# Altium PCB IP3255_1.PcbDoc
Units mil, origin at the board's own origin, x right, y up, seen from the top; angles counter-clockwise.
Board outline 2952.76 x 2086.61 mil, 2 copper layers (Top, Bottom), stack 12.7 mil thick; 71 components, 40 nets, 185 pads, 414 vias.
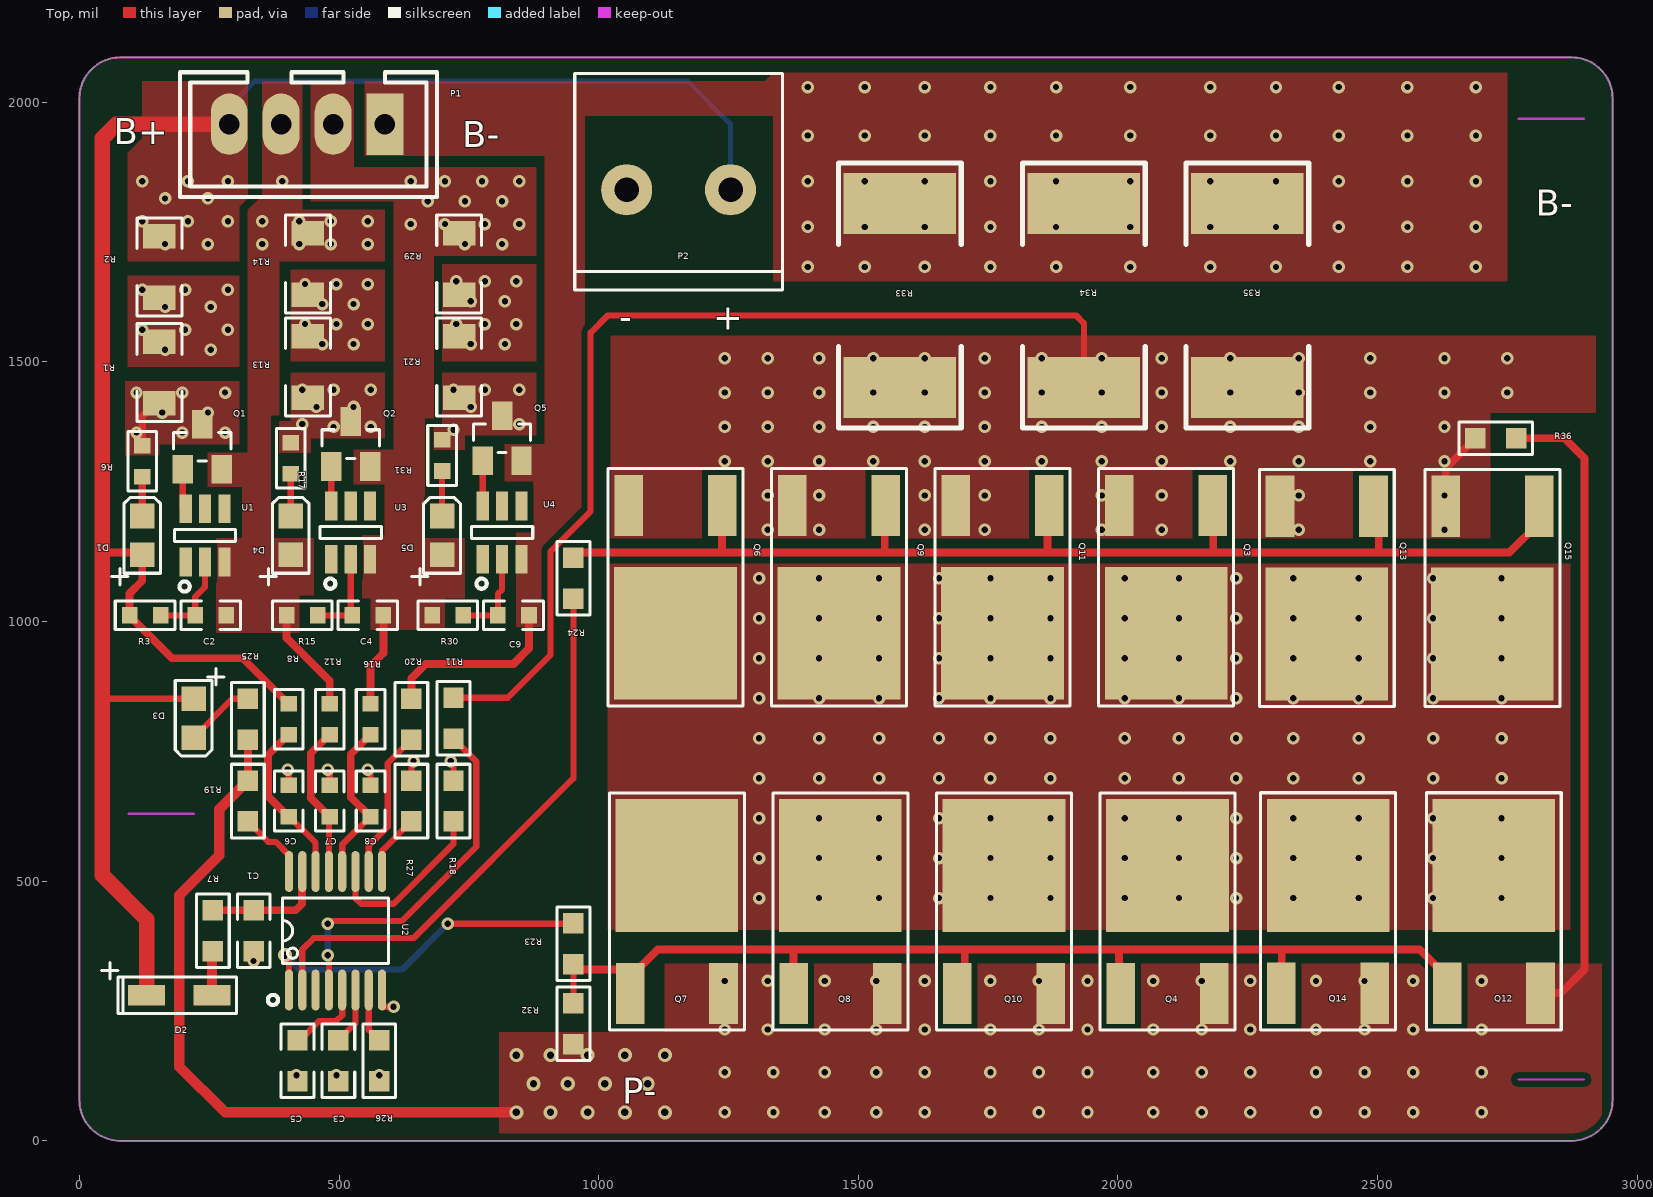
[diagram p0: Top view]
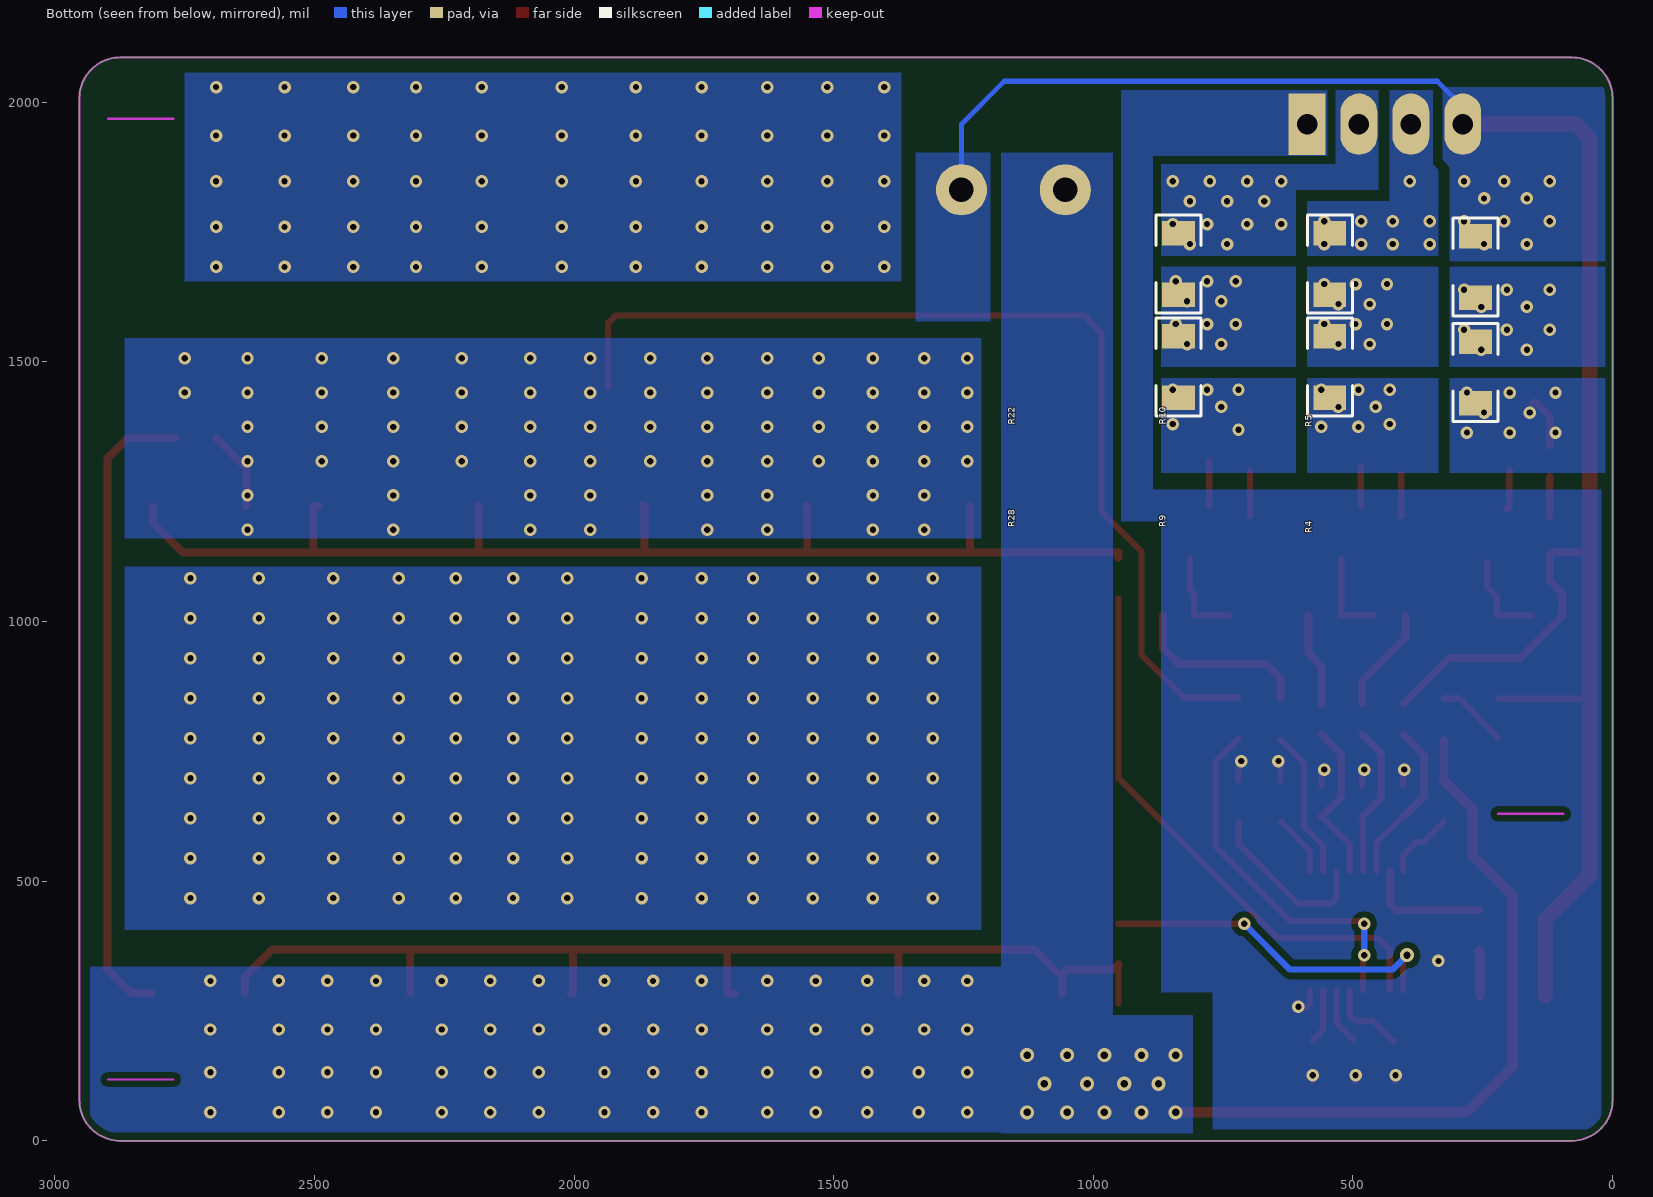
[diagram p1: Bottom view, seen from below]

## Layer stack, top to bottom
Solder Mask Top: solder mask 0.4, Solder Resist, Dk 3.5
Top: signal copper 1.35
Dielectric 1: dielectric 10, FR-4, Dk 4.3
Bottom: signal copper 1.35
Solder Mask Bottom: solder mask 0.4, Solder Resist, Dk 3.5

## Board outline
0,78.74 ccw(c78.74,78.74) 78.74,0 2874.02,0 ccw(c2874.02,78.74) 2952.76,78.74 2952.76,2007.87 ccw(c2874.02,2007.87) 2874.02,2086.61 78.74,2086.61 ccw(c78.74,2007.87) 0,2007.87

## Design rules (kind name [scope] priority, off if disabled: settings)
Clearance "Clearance - Default - DEFAULT- SMD" [IsVia vs IsSMTPin] p1: gap=0 ignorepadtopadclearanceinfootprint=FALSE
Clearance "Clearance - Default - DEFAULT - Via" [IsVia vs IsVia] p2: gap=0 ignorepadtopadclearanceinfootprint=FALSE
Clearance "Clearance - Default - DEFAULT - Net" [All] p3: gap=6 ignorepadtopadclearanceinfootprint=FALSE except(0: Arc-Hole Track-Hole SMDPad-Hole THPad-Hole Via-Hole Fill-Hole Poly-Hole Region-Hole Text-Hole; 10: Fill-Fill Fill-Poly Fill-Region Poly-Poly Poly-Region Region-Region Text-Text; 12: Arc-Fill Arc-Poly Arc-Region Track-Fill Track-Poly Track-Region SMDPad-Fill SMDPad-Poly SMDPad-Region THPad-Fill THPad-Poly THPad-Region Via-Fill Via-Poly Via-Region)
ComponentClearance "ComponentClearance - Default - DEFAULT" [All] p1: gap=0 collisioncheckmode=3 verticalgap=10 showdistances=FALSE
HoleToHoleClearance "HoleToHoleClearance - Default - DEFAULT" [All] p1: gap=0 allowstackedmicrovias=TRUE
Length "Default Length" [All] p1: maxlimit=50000 minlimit=0
MaxMinImpedance "Default Impedance" [All] p1: minimum=50.00 maximum=150.0
ParallelSegment "Default Parallel Segment Same Layer" [All] p1: limit=1000 gap=200
ParallelSegment "Default Parallel Segment Adjasent" [All] p2: limit=1000 gap=200
PlaneConnect "Default PlaneConnect" [All] p1: planeconnectstyle=Direct reliefexpansion=20 reliefentries=4 reliefconductorwidth=15 reliefairgap=10
PolygonConnect "PolygonConnect - Default SMT" [IsSMTPin] p1: connectstyle=Direct reliefconductorwidth=10 reliefentries=4 polygonreliefangle="45 Angle" airgapwidth=10
PolygonConnect "PolygonConnect - Default Pad" [All] p2: connectstyle=Direct reliefconductorwidth=15 reliefentries=4 polygonreliefangle="45 Angle" airgapwidth=10
RoutingLayers "RoutingLayers - Default - DEFAULT" [All] p1: top layer_v5=TRUE bottom layer_v5=TRUE
RoutingPriority "RoutingPriority - Default - DEFAULT" [All] p1: routingpriority=3
RoutingTopology "Default Routing Topology" [All] p1: topology=Shortest
RoutingVias "RoutingVias - Default - DEFAULT" [All] p1: holewidth=12 width=24 viastyle="Through Hole" minholewidth=12 minwidth=24 maxholewidth=12 maxwidth=24
SMDToCorner "SMDToCorner - Default - DEFAULT" [All] p1: distance=0
SolderMaskExpansion "SolderMaskExpansion from CAM settings" [All] p1: expansion=5
Width "Default Width" [All] p1: maxlimit=200 minlimit=4.1 preferedwidth=10
22 further rules are at their usual default settings.

## Components (designator, comment, footprint, x,y, rotation, side; value= is the part's Value field where it differs from the comment)
C1 "0805C" 0805C 335.81,404.7 r270 top
C2 "0603C" 0603C 253,1012 r180 top
C3 "0805C" 0805C 498.76,154 r90 top
C4 "0603C" 0603C 555.5,1012 r180 top
C5 "0805C" 0805C 420.02,154 r90 top
C6 "0603C" 0603C 403.24,654.5 r270 top
C7 "0603C" 0603C 481.98,654.5 r270 top
C8 "0603C" 0603C 560.72,654.5 r270 top
C9 "0603C" 0603C 836,1012 r180 top
D1 "0805D" 0805D 121,1166 r90 top
D2 "SOD123" SOD123 192.5,280.5 r0 top
D3 "0805D" 0805D 220,814 r270 top
D4 "0805D" 0805D 407,1166 r90 top
D5 "0805D" 0805D 698.5,1166 r90 top
P1 "2.54$2F$4PM" 2.54$2F$4PM 588.5,1958 r0 top
P2 "KF127_2" KF127_2 1254,1831.5 r180 top
Q1 "SOT23-3" SOT23-3 236.5,1336.5 r0 top
Q2 "SOT23-3" SOT23-3 522.5,1342 r0 top
Q3 "TO252-3" TO252-3 2092.86,1100.59 r180 top
Q4 "TO252-3" TO252-3 2095.5,407 r0 top
Q5 "SOT23-3" SOT23-3 814,1353 r0 top
Q6 "TO252-3" TO252-3 1147.98,1100.59 r180 top
Q7 "TO252-3" TO252-3 1150.62,407 r0 top
Q8 "TO252-3" TO252-3 1465.58,407 r0 top
Q9 "TO252-3" TO252-3 1462.94,1100.59 r180 top
Q10 "TO252-3" TO252-3 1780.54,407 r0 top
Q11 "TO252-3" TO252-3 1777.9,1100.59 r180 top
Q12 "TO252-3" TO252-3 2723.9,407.59 r0 top
Q13 "TO252-3" TO252-3 2402.26,1099.13 r180 top
Q14 "TO252-3" TO252-3 2404.9,407.59 r0 top
Q15 "TO252-3" TO252-3 2721.26,1099.13 r180 top
R1 "1206C" 1206C 154,1479.5 r90 top
R2 "1206C" 1206C 154,1683 r90 top
R3 "0603R" 0603R 126.5,1012 r180 top
R4 "1206C" 1206C 264,1479.5 r90 bottom
R5 "1206C" 1206C 264,1683 r90 bottom
R6 "0603R" 0603R 121,1309 r270 top
R7 "0805R" 0805R 257.07,404.7 r270 top
R8 "0603R" 0603R 403.24,811.98 r90 top
R9 "1206C" 1206C 544.5,1490.5 r90 bottom
R10 "1206C" 1206C 544.5,1688.5 r90 bottom
R11 "0805R" 0805R 720.5,814 r90 top
R12 "0603R" 0603R 481.98,811.98 r90 top
R13 "1206C" 1206C 440,1490.5 r90 top
R14 "1206C" 1206C 440,1688.5 r90 top
R15 "0603R" 0603R 429,1012 r180 top
R16 "0603R" 0603R 560.72,811.98 r270 top
R17 "0603R" 0603R 407,1314.5 r270 top
R18 "0805R" 0805R 720.5,654.5 r90 top
R19 "0805R" 0805R 324.5,654.5 r270 top
R20 "0805R" 0805R 639.46,811.98 r90 top
R21 "1206C" 1206C 731.5,1490.5 r90 top
R22 "1206C" 1206C 836,1688.5 r90 bottom
R23 "0805R" 0805R 951.5,379.5 r90 top
R24 "0805R" 0805R 951.5,1083.5 r270 top
R25 "0805R" 0805R 324.5,811.98 r90 top
R26 "0805R" 0805R 577.5,154 r270 top
R27 "0805R" 0805R 639.46,654.5 r270 top
R28 "1206C" 1206C 836,1490.5 r90 bottom
R29 "1206C" 1206C 731.5,1688.5 r90 top
R30 "0603R" 0603R 709.5,1012 r180 top
R31 "0603R" 0603R 698.5,1320 r270 top
R32 "0805R" 0805R 951.5,225.5 r90 top
R33 "3920R" 3920R 1580.21,1628 r90 top
R34 "3920R" 3920R 1934.54,1628 r90 top
R35 "3920R" 3920R 2249.5,1628 r90 top
R36 "0805R" 0805R 2728,1353 r0 top
U1 "SOT23-6" SOT23-6 242,1166 r0 top
U2 "TSSOP16-OR65-4R40" TSSOP16-OR65-4R40 493.29,404.7 r0 top
U3 "SOT23-6" SOT23-6 522.5,1171.5 r0 top
U4 "SOT23-6" SOT23-6 814,1171.5 r0 top

## Footprints (in the part's own frame and the unit in brackets; to place one, negate y for a bottom-side part, rotate by r counter-clockwise, add the part's x,y. Pads: shape width x height; smd on the part's side, far side on the other; paste and mask are expansions set on the pad)
2.54$2F$4PM [mm]
  oval 1.8x3 hole 1: 1(-7.62,0) 2(-5.08,0) 3(-2.54,0)
  rect 1.8x3 hole 1: 4(0,0)
  silkscreen extent -10.03,-3.56 2.54,2.54
0603C [mil]
  rect 29.92x31.5 smd: 1(-29.92,0) 2(29.92,0)
  silkscreen extent -57,-28 57,28
0603R [mil]
  rect 29.92x31.5 smd: 1(-29.92,0) 2(29.92,0)
  silkscreen extent -57,-28 57,28
0805C [mm]
  rect 1x1 smd: 1(-1,0) 2(1,0)
  silkscreen extent -1.8,-0.8 1.8,0.8
0805D [mm]
  rect 1.2x1.2 smd: 1(-0.95,0) 2(0.95,0)
  silkscreen extent -2.42,-0.9 1.85,1.49
0805R [mm]
  rect 1x1 smd: 1(-1,0) 2(1,0)
  silkscreen extent -1.8,-0.8 1.8,0.8
1206C [mil]
  rect 47.24x62.99 smd: 1(-59.06,0) 2(59.06,0)
  silkscreen extent -94,-43 94,43
3920R [mm]
  rect 3x5.5 smd: 1(-4.5,0) 2(4.5,0)
  silkscreen extent -6.48,-3 6.48,3
KF127_2 [mm]
  round 2.5 hole 1.2: 1(0,0) 2(5.08,0)
  silkscreen extent -2.54,-5.7 7.62,4.9
SOD123 [mm]
  rect 1.8x1 smd: 1(-1.6,0) 2(1.6,0)
  silkscreen extent -3.8,-0.9 2.8,1.6
SOT23-3 [mm]
  rect 1x1.4 smd: 1(-0.95,-1.1) 2(0.95,-1.1) 3(0,1.1)
  silkscreen extent -1.4,-0.7 1.4,0.7
SOT23-6 [mm]
  rect 0.6x1.4 smd: 1(-0.95,-1.3) 2(0,-1.3) 3(0.95,-1.3) 4(0.95,1.3) 5(0,1.3) 6(-0.95,1.3)
  silkscreen extent -1.5,-2.75 1.5,0.3
TO252-3 [mm]
  rect 1.4x3 smd: 1(-2.285,-3.125) 3(2.285,-3.125)
  rect 6x6.5 smd: 2(0,3.125)
  silkscreen extent -3.3,-4.92 3.3,6.68
TSSOP16-OR65-4R40 [mm]
  oval 0.4x2 smd: 1(-2.275,-2.9) 2(-1.625,-2.9) 3(-0.975,-2.9) 4(-0.325,-2.9) 5(0.325,-2.9) 6(0.975,-2.9) 7(1.625,-2.9) 8(2.275,-2.9) 9(2.275,2.9) 10(1.625,2.9) 11(0.975,2.9) 12(0.325,2.9) 13(-0.325,2.9) 14(-0.975,2.9) 15(-1.625,2.9) 16(-2.275,2.9)
  silkscreen extent -3.31,-3.63 2.6,1.6

## Via types
v1: diameter 24, hole 12, Top to Bottom, 399 vias
v2: diameter 27, hole 14, Top to Bottom, 15 vias

## Nets (pads, with @x,y where several pads share a name; then routed paths per layer and width w, separated by ;. In a path a pad name is that pad's centre, name@x,y a point inside that pad or via, vN(x,y) a via of type N, cw(c..) or ccw(c..) an arc to the next point about the centre after c; other vN are vias at no path point)
$$$5: D3.2 R25.2 | length 135.5
  Top w12: D3.2 294.75,851.35 R25.2
$$$14: R1.2 R2.1 R4.2 R5.1
  other v1: 165,1523.5 253,1523.5 121,1562 203.5,1562 286,1562 165,1606 253,1606 121,1639 203.5,1639 286,1639
$$$15: R9.2 R10.1 R13.2 R14.1
  other v1: 467.5,1534.5 528,1534.5 434.5,1573 495,1573 555.5,1573 467.5,1611.5 528,1611.5 434.5,1650 495,1650 555.5,1650
$$$16: Q1.1 U1.6 | length 81.5
  Top w12: Q1.1 199.1,1217.18 U1.6
$$$17: Q1.3 R1.1 R4.1 R6.1 | length 99.8
  Top w15: R6.1 121,1395.32 146.12,1420.44 R1.1
  other v1: 110,1364 198,1364 280.5,1364 159.5,1402.5 247.5,1402.5 110,1441 198,1441 280.5,1441
$$$18: Q2.1 U3.6 | length 76
  Top w12: U3.6 Q2.1
$$$19: R21.2 R22.1 R28.2 R29.1
  other v1: 753.5,1534.5 819.5,1534.5 726,1573 781,1573 841.5,1573 753.5,1617 819.5,1617 726,1655.5 781,1655.5 841.5,1655.5
$$$20: Q5.1 U4.6 | length 87
  Top w12: U4.6 Q5.1
$$$21: Q5.3 R21.1 R28.1 R31.1
  other v1: 720.5,1369.5 847,1380.5 753.5,1413.5 720.5,1446.5 781,1446.5 847,1446.5
$$$22: Q2.3 R9.1 R13.1 R17.1
  other v1: 489.5,1375 561,1375 429,1380.5 456.5,1413.5 528,1413.5 429,1446.5 489.5,1446.5 561,1446.5
$$$23: C4.2 R15.1 U3.2 | length 176.3
  Top w12: R15.1 C4.2 522.5,1015.08 U3.2
$$$24: C2.2 R3.1 U1.2 | length 177.3
  Top w12: R3.1 C2.2 223.08,1048.05 242,1066.97 U1.2
$$$25: C9.2 R30.1 U4.2 | length 178.3
  Top w12: R30.1 C9.2 806.08,1053.58 814,1061.5 U4.2
$$$31751: D5.2 R31.2 | length 86.7
  Top w12: D5.2 R31.2
$$$31752: R20.1 U2.10 | length 287.8
  Top w12: U2.10 557.27,568.27 594,605 594,727.15 R20.1
$$$31753: R18.1 U2.11 | length 335.7
  Top w12: U2.11 531.68,467.5 542.68,456.5 605,456.5 720.5,572 R18.1
$$$31754: D4.2 R17.2 | length 81.2
  Top w12: D4.2 R17.2
$$$31755: D2.2 R7.2 | length 85.5
  Top w20: D2.2 255.49,363.75 R7.2
$$$31756: D1.2 R6.2 | length 75.7
  Top w15: D1.2 R6.2
B2: C2.1 D4.1 P1.2 Q1.2 R10.2 R12.2 R14.2 R15.2 U1.3 | length 204.4
  Top w15: R15.2 399.08,968.4 481.98,885.5 R12.2
  other v1: 352,1727 423.5,1727 484,1727 555.5,1727 352,1771 423.5,1771 484,1771 555.5,1771 390.5,1848
B3: C4.1 D5.1 P1.3 Q2.2 R16.1 R22.2 R29.2 R30.2 U3.3 | length 180.3
  Top w15: R16.1 560.72,914.21 585.42,938.91 C4.1
  other v1: 742.5,1727 814,1727 638,1765.5 704,1765.5 781,1765.5 847,1765.5 671,1809.5 742.5,1809.5 814,1809.5 638,1848 704,1848 775.5,1848 847,1848
B+: D1.1 D2.1 D3.1 P1.1 P2.1 R2.2 R3.2 R5.2 R8.2 | length 3879.3
  Top w12: 44,852.5 45.1,851.4 D3.1
  Top w15: 44,1133 116.6,1133 D1.1 121,1078.57 96.58,1054.15 R3.2 96.58,1011.21 178.29,929.5 314.85,929.5 402.45,841.9 R8.2
  Top w30: D2.1 129.51,426.3 44,511.81 44,852.5 44,1133 44,1930.5 71.5,1958 P1.1
  Bottom w10: P1.1 288.5,1981.62 295.43,1998.31 337.62,2040.5 1171.5,2040.5 1254,1958 P2.1
  other v1: 165,1727 247.5,1727 121,1771 209,1771 286,1771 165,1815 247.5,1815 121,1848 209,1848 286,1848
B-: C1.2 C3.1 C5.1 C6.1 C7.1 C8.1 C9.1 P1.4 Q5.2 R18.2 R20.2 R26.2 R27.1 R33.2 R34.2 R35.2 U2.8 U4.3 | length 621
  Top w10: v1(418,126.5) 418,114.63 C5.1 ; v1(495,126.5) 495,114.63 C3.1 ; R26.2 v1(577.5,126.5)
  Top w12: v1(401.5,715) 403.24,713.26 C6.1 ; v1(478.5,715) 481.98,711.52 C7.1 ; v1(555.5,715) 560.72,709.78 C8.1 ; U2.8 583,290.39 583,264 588.5,258.5 v1(605,258.5) ; R27.1 639.46,727.46 v1(643.5,731.5) ; v1(715,731.5) 720.5,726 R18.2
  Top w15: R20.2 639.46,891 666.96,918.5 836,918.5 865.92,948.42 C9.1
  other v1: 335.5,346.5 1402.5,1683 1512.5,1683 1628,1683 1754.5,1683 1881,1683 2024,1683 2178,1683 2304.5,1683 2425.5,1683 2557.5,1683 2689.5,1683 1402.5,1760 1512.5,1760 1628,1760 1754.5,1760 1881,1760 2024,1760 2178,1760 2304.5,1760 2425.5,1760 2557.5,1760 2689.5,1760 1402.5,1848 1512.5,1848 1628,1848 1754.5,1848 1881,1848 2024,1848 2178,1848 2304.5,1848 2425.5,1848 2557.5,1848 2689.5,1848 1402.5,1936 1512.5,1936 1628,1936 1754.5,1936 1881,1936 2024,1936 2178,1936 2304.5,1936 2425.5,1936 2557.5,1936 2689.5,1936 1402.5,2029.5 1512.5,2029.5 1628,2029.5 1754.5,2029.5 1881,2029.5 2024,2029.5 2178,2029.5 2304.5,2029.5 2425.5,2029.5 2557.5,2029.5 2689.5,2029.5
CCT: C3.2 U2.6 | length 110.8
  Top w12: C3.2 531.68,226.29 U2.6
CDT: C5.2 U2.5 | length 157.8
  Top w12: C5.2 422.19,193.37 422.19,191.2 462,231 495,231 506.09,242.09 U2.5
CON: R23.2 U2.1 | length 674.4
  Top w12: v2(396,357.5) 403.72,349.78 U2.1 ; v1(709.5,418) 951.5,418 R23.2
  Bottom w12: v2(396,357.5) 423.5,330 621.5,330 v1(709.5,418)
CON_R: Q4.1 Q7.1 Q8.1 Q10.1 Q12.1 Q14.1 R23.1 R32.2 | length 2265.3
  Top w12: R32.2 R23.1
  Top w15: R23.1 961.63,330 1050.5,330 1060.66,319.84 Q7.1 1060.66,315.46 1113.69,368.5 1375,368.5 ; Q8.1 1375,283.97 1375,368.5 ; Q10.1 1705,283.97 1705,368.5 ; Q4.1 2002,283.97 2002,368.5 ; Q14.1 2315.5,284.56 2315.5,368.5 ; Q12.1 2633.94,316.06 2581.49,368.5 2315.5,368.5 ; 1375,368.5 1705,368.5 ; 1705,368.5 2002,368.5 ; 2002,368.5 2315.5,368.5
DON: R24.2 U2.2 | length 1082.5
  Top w12: U2.2 429.32,368.5 451.32,390.5 643.5,390.5 951.5,698.5 R24.2
DON_R: Q3.1 Q6.1 Q9.1 Q11.1 Q13.1 Q15.1 R24.1 | length 2393.5
  Top w15: R24.1 951.5,1133 1237.5,1133 ; Q6.1 1237.5,1223.62 1237.5,1133 ; Q9.1 1551,1223.62 1551,1133 ; Q11.1 1864.5,1223.62 1864.5,1133 ; Q3.1 2183.5,1223.62 2183.5,1133 ; Q13.1 2502.5,1222.16 2502.5,1133 ; Q15.1 2811.22,1190.67 2753.55,1133 2502.5,1133 ; 1237.5,1133 1551,1133 ; 1551,1133 1864.5,1133 ; 1864.5,1133 2183.5,1133 ; 2183.5,1133 2502.5,1133
GND: P2.2 Q4.3 Q7.3 Q8.3 Q10.3 Q12.3 Q14.3 R19.1 R25.1 R32.1 R36.2 | length 2604.8
  Top w15: R19.1 R25.1 ; R36.2 2860,1353 2898.5,1314.5 2898.5,330 2853.06,284.56 Q12.3
  Top w20: R19.1 269.5,638.87 269.5,550 192.5,473 192.5,143 280.5,55 v2(841.5,55)
  other v1: 1243,55 1336.5,55 1435.5,55 1534.5,55 1628,55 1754.5,55 1848,55 1941.5,55 2068,55 2161.5,55 2255,55 2381.5,55 2475,55 2568.5,55 2700.5,55 1243,132 1336.5,132 1435.5,132 1534.5,132 1628,132 1754.5,132 1848,132 1941.5,132 2068,132 2161.5,132 2255,132 2381.5,132 2475,132 2568.5,132 2700.5,132 1243,214.5 1325.5,214.5 1435.5,214.5 1534.5,214.5 1628,214.5 1754.5,214.5 1848,214.5 1941.5,214.5 2068,214.5 2161.5,214.5 2255,214.5 2381.5,214.5 2475,214.5 2568.5,214.5 2700.5,214.5 1243,308 1325.5,308 1435.5,308 1534.5,308 1628,308 1754.5,308 1848,308 1941.5,308 2068,308 2161.5,308 2255,308 2381.5,308 2475,308 2568.5,308 2700.5,308
  other v2: 907.5,55 979,55 1050.5,55 1127.5,55 874.5,110 940.5,110 1012,110 1094.5,110 841.5,165 907.5,165 979,165 1050.5,165 1127.5,165
MOS_IN: Q3.2 Q4.2 Q6.2 Q7.2 Q8.2 Q9.2 Q10.2 Q11.2 Q12.2 Q13.2 Q14.2 Q15.2
  other v1: 1309,467.5 1424.5,467.5 1540,467.5 1655.5,467.5 1754.5,467.5 1870,467.5 2013,467.5 2117.5,467.5 2227.5,467.5 2337.5,467.5 2464,467.5 2607,467.5 2739,467.5 1309,544.5 1424.5,544.5 1540,544.5 1655.5,544.5 1754.5,544.5 1870,544.5 2013,544.5 2117.5,544.5 2227.5,544.5 2337.5,544.5 2464,544.5 2607,544.5 2739,544.5 1309,621.5 1424.5,621.5 1540,621.5 1655.5,621.5 1754.5,621.5 1870,621.5 2013,621.5 2117.5,621.5 2227.5,621.5 2337.5,621.5 2464,621.5 2607,621.5 2739,621.5 1309,698.5 1424.5,698.5 1540,698.5 1655.5,698.5 1754.5,698.5 1870,698.5 2013,698.5 2117.5,698.5 2227.5,698.5 2337.5,698.5 2464,698.5 2607,698.5 2739,698.5 1309,775.5 1424.5,775.5 1540,775.5 1655.5,775.5 1754.5,775.5 1870,775.5 2013,775.5 2117.5,775.5 2227.5,775.5 2337.5,775.5 2464,775.5 2607,775.5 2739,775.5 1309,852.5 1424.5,852.5 1540,852.5 1655.5,852.5 1754.5,852.5 1870,852.5 2013,852.5 2117.5,852.5 2227.5,852.5 2337.5,852.5 2464,852.5 2607,852.5 2739,852.5 1309,929.5 1424.5,929.5 1540,929.5 1655.5,929.5 1754.5,929.5 1870,929.5 2013,929.5 2117.5,929.5 2227.5,929.5 2337.5,929.5 2464,929.5 2607,929.5 2739,929.5 1309,1006.5 1424.5,1006.5 1540,1006.5 1655.5,1006.5 1754.5,1006.5 1870,1006.5 2013,1006.5 2117.5,1006.5 2227.5,1006.5 2337.5,1006.5 2464,1006.5 2607,1006.5 2739,1006.5 1309,1083.5 1424.5,1083.5 1540,1083.5 1655.5,1083.5 1754.5,1083.5 1870,1083.5 2013,1083.5 2117.5,1083.5 2227.5,1083.5 2337.5,1083.5 2464,1083.5 2607,1083.5 2739,1083.5
MOS_R: Q3.3 Q6.3 Q9.3 Q11.3 Q13.3 Q15.3 R11.2 R33.1 R34.1 R35.1 R36.1 | length 2121.8
  Top w12: R11.2 825,853.37 907.5,935.87 907.5,1135.21 984.5,1212.21 984.5,1556.5 1017.5,1589.5 1919.5,1589.5 1934.54,1574.46 R34.1
  Top w15: Q15.3 2631.3,1295.67 R36.1
  other v1: 1325.5,1177 1424.5,1177 1628,1177 1743.5,1177 1969,1177 2084.5,1177 2348.5,1177 2629,1177 1325.5,1243 1424.5,1243 1628,1243 1743.5,1243 1969,1243 2084.5,1243 2348.5,1243 2629,1243 1243,1309 1325.5,1309 1424.5,1309 1529,1309 1628,1309 1743.5,1309 1853.5,1309 1969,1309 2084.5,1309 2216.5,1309 2348.5,1309 2486,1309 2629,1309 1243,1375 1325.5,1375 1424.5,1375 1529,1375 1628,1375 1743.5,1375 1853.5,1375 1969,1375 2084.5,1375 2216.5,1375 2348.5,1375 2486,1375 2629,1375 1243,1441 1325.5,1441 1424.5,1441 1529,1441 1628,1441 1743.5,1441 1853.5,1441 1969,1441 2084.5,1441 2216.5,1441 2348.5,1441 2486,1441 2629,1441 2750,1441 1243,1507 1325.5,1507 1424.5,1507 1529,1507 1628,1507 1743.5,1507 1853.5,1507 1969,1507 2084.5,1507 2216.5,1507 2348.5,1507 2486,1507 2629,1507 2750,1507
SEL: R27.2 U2.9 | length 119.7
  Top w12: U2.9 582.86,558.53 R27.2
TEMP: R26.1 U2.7 | length 105.5
  Top w12: U2.7 557.27,213.6 R26.1
VC1: C6.2 R8.1 U2.14 | length 319.3
  Top w12: C6.2 404.03,624.58 454.91,573.7 U2.14
  Top w15: C6.2 402.45,624.58 363,664.03 363,742.61 402.45,782.06 R8.1
VC2: C7.2 R12.1 U2.13 | length 294.9
  Top w12: U2.13 480.5,623.1 C7.2
  Top w15: C7.2 481.19,624.58 445.5,660.27 445.5,746.37 481.19,782.06 R12.1
VC3: C8.2 R16.2 U2.12 | length 318.9
  Top w12: U2.12 506.09,570.74 559.93,624.58 C8.2
  Top w15: C8.2 559.93,624.58 522.5,662.01 522.5,744.63 559.93,782.06 R16.2
VDD: C1.1 R7.1 U2.15 | length 239.8
  Top w15: R7.1 C1.1 416.57,444.07 429,456.5 429,518.87 U2.15
VINI: R11.1 U2.4 | length 702.2
  Top w12: v1(478.5,357.5) 480.5,355.5 U2.4 ; v1(478.5,418) 484,423.5 621.5,423.5 764.5,566.5 764.5,730.63 R11.1
  Bottom w12: v1(478.5,357.5) v1(478.5,418)
VMN: R19.2 U2.16 | length 137.5
  Top w12: R19.2 363.94,575.69 378.4,575.69 403.72,550.37 U2.16
pads on no net: U1.1 U1.4 U1.5 U2.3 U3.1 U3.4 U3.5 U4.1 U4.4 U4.5

## Polygon pours and split planes (outlines as drawn)
B- on Bottom "Bottom-B-" (solid, remove dead copper, pour order 72): 1369.5,2057 1369.5,1655.5 2750,1655.5 2750,2057
B3 on Bottom "Bottom-B3" (solid, remove dead copper, pour order 70): 451,2024 451,1831.5 610.5,1831.5 610.5,1705 869,1705 869,1881 533.5,1881 533.5,2024
MOS_R on Bottom "Bottom-MOS_R" (solid, remove dead copper, pour order 68): 1215.5,1545.5 1215.5,1160.5 2865.5,1160.5 2865.5,1545.5
GND on Bottom "Bottom-GND" (solid, remove dead copper, pour order 56): 962.5,1903 962.5,242 808.5,242 808.5,-5.5 1177,-5.5 1177,1903
B- on Bottom "Bottom-B- 1" (solid, remove dead copper, pour order 42): 22,1254 22,22 770,22 770,286 869,286 869,1254
$$$19 on Bottom "Bottom-$$$19" (solid, remove dead copper, pour order 40): 610.5,1683 610.5,1490.5 869,1490.5 869,1683
B+ on Bottom "Bottom-B+" (solid, remove dead copper, pour order 38): 313.5,1694 313.5,1875.5 327.25,1889.25 327.25,2029.5 11,2029.5 11,1694
$$$21 on Bottom "Bottom-$$$21" (solid, remove dead copper, pour order 34): 610.5,1468.5 610.5,1287 869,1287 869,1468.5
GND on Bottom "Bottom-GND 1" (solid, remove dead copper, pour order 26): 1089,335.5 1089,16.5 2931.5,16.5 2931.5,335.5
MOS_IN on Bottom "Bottom-MOS_IN" (solid, remove dead copper, pour order 20): 1215.5,1105.5 1215.5,407 2865.5,407 2865.5,1105.5
B+ on Bottom "Bottom-B+ 1" (solid, remove dead copper, pour order 16): 1199,1903 1199,1578.5 1342,1578.5 1342,1903
B- on Bottom "Bottom-B- 2" (solid, remove dead copper, pour order 12): 830.5,1254 830.5,1237.5 759,1237.5 759,1193.5 946,1193.5 946,2024 550,2024 550,1897.5 885.5,1897.5 885.5,1254
$$$14 on Bottom "Bottom-$$$14" (solid, remove dead copper, pour order 8): 313.5,1683 11,1683 11,1490.5 313.5,1490.5
$$$15 on Bottom "Bottom-$$$15" (solid, remove dead copper, pour order 6): 588.5,1683 335.5,1683 335.5,1490.5 588.5,1490.5
$$$17 on Bottom "Bottom-$$$17" (solid, remove dead copper, pour order 4): 11,1468.5 11,1287 313.5,1287 313.5,1468.5
$$$22 on Bottom "Bottom-$$$22" (solid, remove dead copper, pour order 2): 335.5,1468.5 335.5,1287 588.5,1287 588.5,1468.5
B2 on Bottom "Bottom-B2" (solid, remove dead copper, pour order 0): 588.5,1705 588.5,1809.5 429,1809.5 429,2029.5 346.5,2029.5 346.5,1881 335.5,1870 335.5,1705
no net on Solder Mask Bottom (solid): 346.5,1853.5 418,1853.5 418,1804 484,1804 484,1721.5 346.5,1721.5
no net on Solder Mask Bottom (solid): 346.5,1666.5 495,1666.5 495,1507 346.5,1507
no net on Solder Mask Bottom (solid): 27.5,1666.5 203.5,1666.5 203.5,1507 27.5,1507
no net on Solder Mask Bottom (solid): 1001,1837 1105.5,1837 1105.5,291.5 2717,291.5 2717,60.5 1001,60.5
no net on Solder Mask Bottom (solid): 346.5,1457.5 495,1457.5 495,1298 346.5,1298
no net on Solder Mask Bottom (solid): 621.5,1677.5 786.5,1677.5 786.5,1507 627,1507 627,1512.5 621.5,1512.5
no net on Solder Mask Bottom (solid): 1221,1732.5 1314.5,1732.5 1314.5,1617 1221,1617
no net on Solder Mask Bottom (solid): 627,1875.5 858,1875.5 858,1793 786.5,1793 786.5,1721.5 627,1721.5
no net on Solder Mask Bottom (solid): 33,2007.5 209,2007.5 209,1710.5 33,1710.5
no net on Solder Mask Bottom (solid): 621.5,1457.5 781,1457.5 781,1303.5 621.5,1303.5
no net on Solder Mask Bottom (solid): 33,1452 209,1452 209,1303.5 33,1303.5
no net on Solder Mask Top (solid): 1177,187 2695,187 2695,44 1177,44
no net on Solder Mask Top (solid): 1364,2046 2722.5,2046 2722.5,1892 1364,1892
no net on Solder Mask Top (solid): 1028.5,814 2843.5,814 2843.5,698.5 1028.5,698.5
B3 on Top "Top-B3" (solid, remove dead copper, pour order 74): 445.5,2040.5 445.5,1809.5 605,1809.5 605,1705 781,1705 781,1875.5 528,1875.5 528,2040.5
B+ on Top "Top-B+" (solid, remove dead copper, pour order 66): 324.5,2040.5 121,2040.5 121,1930.5 93.5,1903 93.5,1694 308,1694 308,1798.5 324.5,1815
B2 on Top "Top-B2" (solid, remove dead copper, pour order 64): 313.5,1276 313.5,1160.5 264,1160.5 264,979 423.5,979 423.5,1050.5 451,1050.5 451,1160.5 368.5,1160.5 368.5,1276
B2 on Top "Top-B2 1" (solid, remove dead copper, pour order 62): 456.5,1793 456.5,1694 588.5,1694 588.5,1793
B3 on Top "Top-B3 1" (solid, remove dead copper, pour order 60): 764.5,1875.5 764.5,1870 731.5,1870 731.5,1705 880,1705 880,1875.5
$$$22 on Top "Top-$$$22" (solid, remove dead copper, pour order 58): 407,1479.5 407,1386 385,1386 385,1325.5 445.5,1325.5 445.5,1353 588.5,1353 588.5,1479.5
$$$17 on Top "Top-$$$17" (solid, remove dead copper, pour order 54): 88,1463 88,1320 154,1320 154,1342 308,1342 308,1463
B- on Top "Top-B-" (solid, remove dead copper, pour order 52): 841.5,990 913,990 913,1166 973.5,1166 973.5,1292.5 874.5,1292.5 874.5,1171.5 841.5,1171.5
$$$21 on Top "Top-$$$21" (solid, remove dead copper, pour order 50): 698.5,1479.5 698.5,1375 682,1375 682,1331 742.5,1331 742.5,1358.5 880,1358.5 880,1479.5
B2 on Top "Top-B2 2" (solid, remove dead copper, pour order 48): 352,2040.5 352,1820.5 324.5,1793 324.5,1325.5 247.5,1325.5 247.5,1259.5 368.5,1259.5 368.5,1397 385,1397 385,1694 484,1694 484,1793 429,1793 429,2040.5
B- on Top "Top-B- 1" (solid, remove dead copper, pour order 46): 1336.5,2057 1336.5,1655.5 2750,1655.5 2750,2057
$$$19 on Top "Top-$$$19" (solid, remove dead copper, pour order 44): 698.5,1688.5 698.5,1501.5 880,1501.5 880,1688.5
B3 on Top "Top-B3 2" (solid, remove dead copper, pour order 36): 605,1760 605,1331 528,1331 528,1265 665.5,1265 665.5,1391.5 682,1391.5 682,1760
$$$15 on Top "Top-$$$15" (solid, remove dead copper, pour order 32): 407,1677.5 407,1501.5 588.5,1501.5 588.5,1677.5
B- on Top "Top-B- 2" (solid, remove dead copper, pour order 30): 550,2040.5 550,1897.5 896.5,1897.5 896.5,1342 819.5,1342 819.5,1270.5 973.5,1270.5 973.5,2040.5
GND on Top "Top-GND" (solid, remove dead copper, pour order 28): 1127.5,341 1127.5,209 808.5,209 808.5,11 2931.5,11 2931.5,341
B3 on Top "Top-B3 3" (solid, remove dead copper, pour order 24): 588.5,1276 588.5,1166 544.5,1166 544.5,1045 561,1045 561,984.5 704,984.5 704,1045 742.5,1045 742.5,1160.5 665.5,1160.5 665.5,1276
MOS_IN on Top "Top-MOS_IN" (solid, remove dead copper, pour order 22): 1017.5,1111 1017.5,407 2871,407 2871,1111
$$$14 on Top "Top-$$$14" (solid, remove dead copper, pour order 18): 93.5,1666.5 93.5,1490.5 308,1490.5 308,1666.5
MOS_R on Top "Top-MOS_R" (solid, remove dead copper, pour order 14): 1023,1160.5 2717,1160.5 2717,1402.5 2920.5,1402.5 2920.5,1551 1023,1551
B- on Top "Top-B- 3" (solid, remove dead copper, pour order 10): 940.5,2040.5 1320,2040.5 1336.5,2057 1430,2057 1430,1974.5 940.5,1974.5

## Keep-outs
Keep-Out Layer:
  lines w4: 94.49,629.92 220.47,629.92 ; 2771.65,118.11 2897.64,118.11 ; 2771.65,1968.5 2897.64,1968.5 ; 0,78.74 ccw(c78.74,78.74) 78.74,0 2874.02,0 ccw(c2874.02,78.74) 2952.76,78.74 2952.76,2007.87 ccw(c2874.02,2007.87) 2874.02,2086.61 78.74,2086.61 ccw(c78.74,2007.87) 0,2007.87 0,78.74

## Silkscreen, mask and mechanical layers (free items; w line width, h text height)
Silkscreen Top:
  text "B+" at 66,1919.5 h50
  text "B-" at 737,1914 h50
  text "B-" at 2805,1782 h50
  text "-" at 1039.5,1562 h50
  text "+" at 1221,1562 h50
  text "P-" at 1045,71.5 h50